# Altium PCB Board_TP3.PcbDoc
Units mm, origin at the board's own origin, x right, y up, seen from the top; angles counter-clockwise.
Board outline 48.4 x 65.3 mm, 2 copper layers (Top Layer, Bottom Layer); 36 components, 22 nets, 140 pads, 0 vias.
Unrouted connection lines stored in the file: 74.
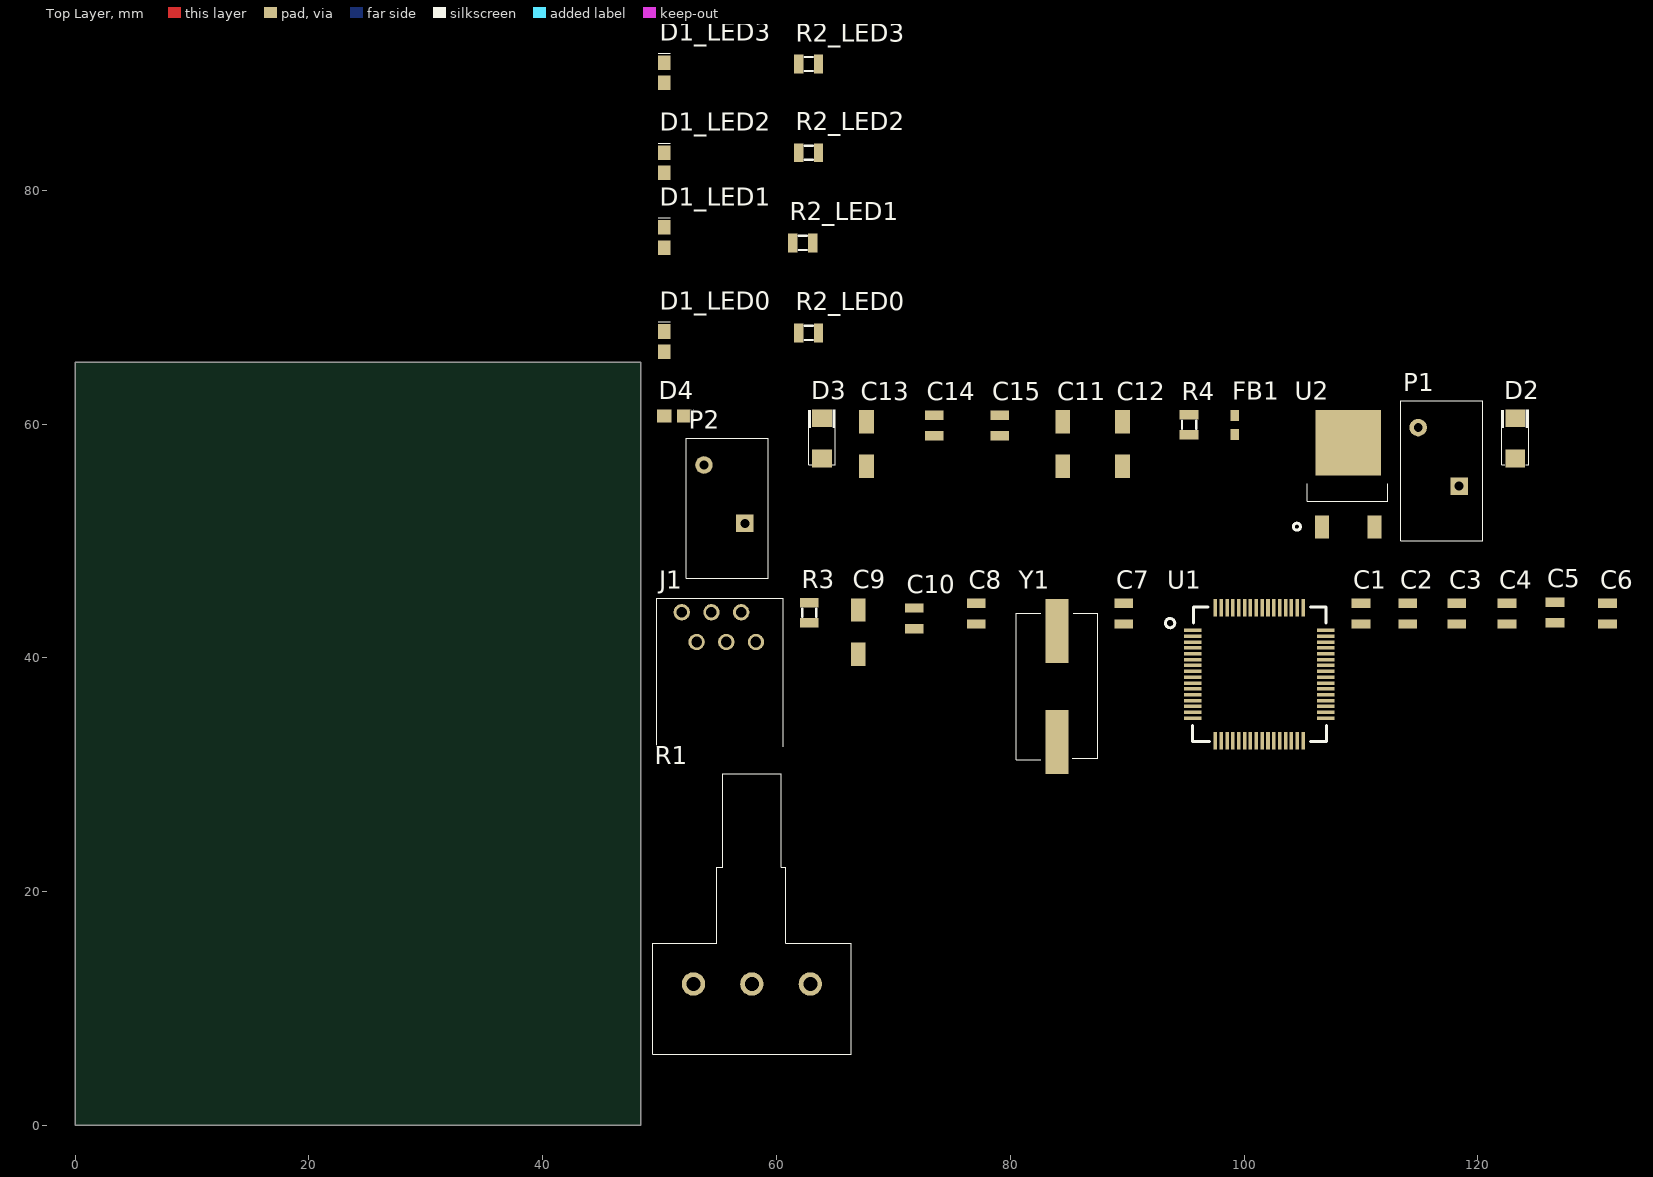
[diagram p0: Top Layer view]
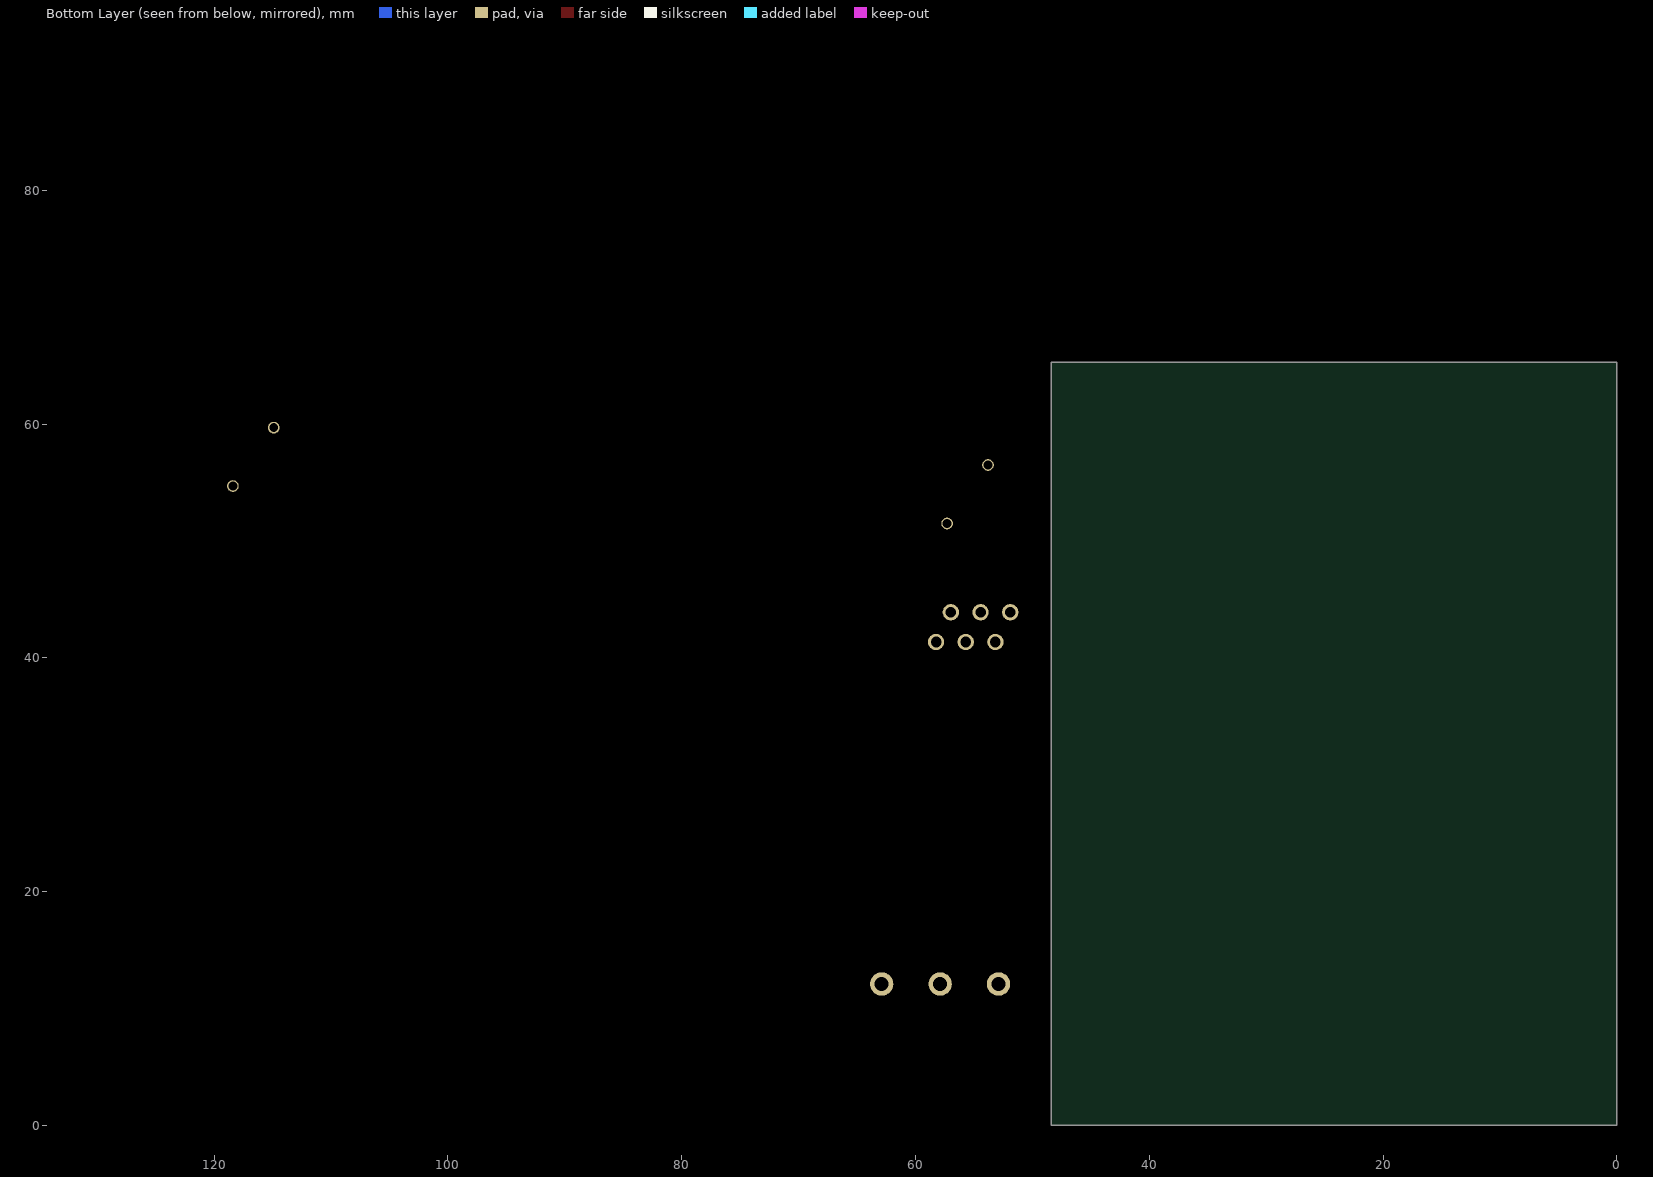
[diagram p1: Bottom Layer view, seen from below]

## Layer stack, top to bottom
Top Solder: solder mask 0.0102, Solder Resist, Dk 3.5
Top Layer: signal copper 0.0356
Dielectric 1: dielectric 0.32, FR-4, Dk 4.8
Bottom Layer: signal copper 0.0356
Bottom Solder: solder mask 0.0102, Solder Resist, Dk 3.5

## Board outline
0,0 48.4,0 48.4,65.3 0,65.3

## Design rules (kind name [scope] priority, off if disabled: settings)
Clearance [All] p1: gap=0.2
HoleSize [All] p1: absolutevalues=TRUE maxlimit=2.54 minlimit=0.3 maxpercent=80.000 minpercent=20.000
PolygonConnect [All] p1: connectstyle=Relief reliefconductorwidth=0.254 reliefentries=4 polygonreliefangle="90 Angle" airgapwidth=0.254
RoutingVias [All] p1: holewidth=0.711 width=1.27 viastyle="Through Hole" minholewidth=0.2 minwidth=0.3 maxholewidth=0.711 maxwidth=1.27
SolderMaskExpansion [All] p1: expansion=0.102
UnpouredPolygon [All] p1: allowunpoured=FALSE
Width [All] p1: maxlimit=0.3 minlimit=0.2 preferedwidth=0.254
28 further rules are at their usual default settings.

## Classes and differential pairs
component class global: R1
component class LED0: D1_LED0 R2_LED0
component class LED1: D1_LED1 R2_LED1
component class LED2: D1_LED2 R2_LED2
component class LED3: D1_LED3 R2_LED3
component class PIC: C1 C2 C3 C4 C5 C6 C7 C8 C9 C10 J1 R3 U1 Y1
component class POWER: C11 C12 C13 C14 C15 D2 D3 D4 FB1 P1 P2 R4 U2
net class LED[0..3]: LED0 LED1 LED2 LED3
channel class led: LED0 LED1 LED2 LED3

## Components (designator, comment, footprint, x,y, rotation, side; value= is the part's Value field where it differs from the comment)
C1 "100nF" CAPC1608N 110,42.9 r0 top
C2 "100nF" CAPC1608N 114,42.9 r0 top
C3 "100nF" CAPC1608N 118.2,42.9 r0 top
C4 "100nF" CAPC1608N 122.5,42.9 r0 top
C5 "100nF" CAPC1608N 126.6,43 r0 top
C6 "100nF" CAPC1608N 131.1,42.9 r0 top
C7 "20pF" CAPC1608N 89.7,42.9 r0 top
C8 "20pF" CAPC1608N 77.1,42.9 r0 top
C9 "10uF" CAPC2012N 67,40.3 r90 top
C10 "1uF" CAPC1608N 71.8,42.5 r0 top
C11 "" CAPC2012N 84.5,56.4 r90 top
C12 "10uF" CAPC2012N 89.6,56.4 r90 top
C13 "Cap" CAPC2012N 67.7,56.4 r90 top
C14 "Cap" CAPC1608N 73.5,59 r0 top
C15 "Cap" CAPC1608N 79.1,59 r0 top
D1_LED0 "Green LED" "LED 0805" 50.4,66.2 r90 top (schematic designator D1)
D1_LED1 "Green LED" "LED 0805" 50.4,75.1 r90 top (schematic designator D1)
D1_LED2 "Green LED" "LED 0805" 50.4,81.5 r90 top (schematic designator D1)
D1_LED3 "Green LED" "LED 0805" 50.4,89.2 r90 top (schematic designator D1)
D2 "Diode" SMA/DO-214AC_21 123.2,60.5 r90 top
D3 "Diode" SMA/DO-214AC_21 63.9,60.5 r90 top
D4 "Green LED" "LED 0805" 50.4,60.7 r0 top
FB1 "Inductor" INDC1608AN 99.2,59.1 r90 top
J1 "Program / Debug" RJ12_90 51.9,43.9 r0 top
P1 "12V" PHOENIX_1985195 113.4,62 r0 top
P2 "12V" PHOENIX_1985195 52.3,58.8 r0 top
R1 "1K" PDB181-K415K-102A2 57.9,12.1 r0 top
R2_LED0 "330r" RESC1608n 63.6,67.8 r90 top (schematic designator R2)
R2_LED1 "330r" RESC1608n 63.1,75.5 r90 top (schematic designator R2)
R2_LED2 "330r" RESC1608n 63.6,83.2 r90 top (schematic designator R2)
R2_LED3 "330r" RESC1608n 63.6,90.8 r90 top (schematic designator R2)
R3 "4.7k" RESC1608N 62.8,43 r0 top
R4 "470r" RESC1608N 95.3,59.1 r0 top
U1 "PIC32MX764F128H-I/PT" PIC 101.3,38.6 r0 top
U2 "AP1117" TD03B_N 108.9,58.4 r0 top
Y1 "8MHz" "HC49/4H SMX CRYSTAL" 84,32.8 r90 top

## Footprints (in the part's own frame and the unit in brackets; to place one, negate y for a bottom-side part, rotate by r counter-clockwise, add the part's x,y. Pads: shape width x height; smd on the part's side, far side on the other; paste and mask are expansions set on the pad)
CAPC1608N [mm] "100nF"
  rect 1.6x0.8 smd: 1(0,0) 2(0,1.77)
CAPC2012N [mm]
  rect 2x1.25 smd: 1(0,0) 2(3.8,0)
"HC49/4H SMX CRYSTAL" [mm]
  rect 5.5x2 smd: 1(0,0) 2(9.5,0)
  silkscreen extent -1.5,-3.5 11,3.5
INDC1608AN [mm]
  rect 0.95x0.7 smd: 1(0,0) 2(1.65,0)
"LED 0805" [mm]
  rect 1.25x1.1 smd: 1(0,0) 2(1.725,0)
  silkscreen extent 2.54,-0.51 2.54,0.51
PDB181-K415K-102A2 [mm]
  round 2 hole 1.2: 1(5,0) 2(0,0) 3(-5,0)
  silkscreen extent -8.5,-6 8.5,18
PHOENIX_1985195 [mm]
  round 1.5 / inner round 1.5 / far side round 1 hole 0.762: 1(1.5,-2.3)
  rect 1.5x1.5 / inner round 1.524 / far side round 1 hole 0.762: 2(5,-7.3)
  silkscreen extent 0,-12 7,0
PIC [mm]
  rect 1.5x0.3 smd: 1(-5.7,3.75) 2(-5.7,3.25) 3(-5.7,2.75) 4(-5.7,2.25) 5(-5.7,1.75) 6(-5.7,1.25) 7(-5.7,0.75) 8(-5.7,0.25) 9(-5.7,-0.25) 10(-5.7,-0.75) 11(-5.7,-1.25) 12(-5.7,-1.75) 13(-5.7,-2.25) 14(-5.7,-2.75) 15(-5.7,-3.25) 16(-5.7,-3.75) 33(5.7,-3.75) 34(5.7,-3.25) 35(5.7,-2.75) 36(5.7,-2.25) 37(5.7,-1.75) 38(5.7,-1.25) 39(5.7,-0.75) 40(5.7,-0.25) 41(5.7,0.25) 42(5.7,0.75) 43(5.7,1.25) 44(5.7,1.75) 45(5.7,2.25) 46(5.7,2.75) 47(5.7,3.25) 48(5.7,3.75)
  rect 0.3x1.5 smd: 17(-3.75,-5.7) 18(-3.25,-5.7) 19(-2.75,-5.7) 20(-2.25,-5.7) 21(-1.75,-5.7) 22(-1.25,-5.7) 23(-0.75,-5.7) 24(-0.25,-5.7) 25(0.25,-5.7) 26(0.75,-5.7) 27(1.25,-5.7) 28(1.75,-5.7) 29(2.25,-5.7) 30(2.75,-5.7) 31(3.25,-5.7) 32(3.75,-5.7) 49(3.75,5.7) 50(3.25,5.7) 51(2.75,5.7) 52(2.25,5.7) 53(1.75,5.7) 54(1.25,5.7) 55(0.75,5.7) 56(0.25,5.7) 57(-0.25,5.7) 58(-0.75,5.7) 59(-1.25,5.7) 60(-1.75,5.7) 61(-2.25,5.7) 62(-2.75,5.7) 63(-3.25,5.7) 64(-3.75,5.7)
  silkscreen extent -8.02,-5.75 5.75,5.75
RESC1608n [mm]
  rect 1.6x0.8 smd: 1(0,1.705) 2(0,0)
  silkscreen extent -0.6,0.5 0.6,1.2
RESC1608N [mm]
  rect 1.6x0.8 smd: 1(0,1.705) 2(0,0)
  silkscreen extent -0.6,0.5 0.6,1.2
RJ12_90 [mm]
  round 1.4 hole 0.9: 1(0,0) 2(1.27,-2.54) 3(2.54,0) 4(3.81,-2.54) 5(5.08,0) 6(6.35,-2.54)
  silkscreen extent -2.16,-11.5 8.69,1.19
SMA/DO-214AC_21 [mm]
  rect 1.52x1.68 smd: 1(-3.454,0) 2(-0.004,0)
  silkscreen extent -3.96,-1.14 0.71,1.14
TD03B_N [mm]
  rect 1.2x2 smd: 1(2.25,-7.2) 3(-2.25,-7.2)
  rect 5.6x5.6 smd: 4(0,0)
  silkscreen extent -4.67,-7.47 3.4,-3.5

## Part data
C1 C2 C3 C4 C5 C6 C7 C8 C9 C10 C11 C12: library part Cap, "Capacitor"
C13 C14 C15: "Capacitor"
D1_LED0 D1_LED1 D1_LED2 D1_LED3 D4: library part LED0, "Typical INFRARED GaAs LED"
D2 D3: "Default Diode"
R1: library part RPot, "Potentiometer"
R2_LED0 R2_LED1 R2_LED2 R2_LED3 R3 R4: library part Res1, "Resistor"
U1: library part "Pic - 32MX"
Y1: library part XTAL, "Crystal Oscillator"

## Nets (pads, with @x,y where several pads share a name; then routed paths per layer and width w, separated by ;. In a path a pad name is that pad's centre, name@x,y a point inside that pad or via, vN(x,y) a via of type N, cw(c..) or ccw(c..) an arc to the next point about the centre after c; other vN are vias at no path point)
ALIM: D2.1 P1.1
BATTERY: D3.1 P2.1
GND: C1.1 C2.1 C3.1 C4.1 C5.1 C6.1 C7.2 C8.2 C9.1 C10.1 C11.1 C12.1 C13.1 C14.1 C15.1 D1_LED0.2 D1_LED1.2 D1_LED2.2 D1_LED3.2 D4.2 J1.3 P1.2 P2.2 R1.1 U1.9 U1.20 U1.25 U1.41 U2.1
LED0: R2_LED0.2 U1.46
LED1: R2_LED1.2 U1.49
LED2: R2_LED2.2 U1.50
LED3: R2_LED3.2 U1.51
MCLR: J1.1 R3.1 U1.7
NetC9_2: C9.2 C10.2 U1.56
NetD1_LED0_1: D1_LED0.1 R2_LED0.1
NetD1_LED1_1: D1_LED1.1 R2_LED1.1
NetD1_LED2_1: D1_LED2.1 R2_LED2.1
NetD1_LED3_1: D1_LED3.1 R2_LED3.1
NetD4_1: D4.1 R4.1
NetR1_3: R1.3 U1.14
PGC: J1.5 U1.15
PGD: J1.4 U1.16
V3P3: C1.2 C2.2 C3.2 C4.2 C5.2 C13.2 C14.2 FB1.1 J1.2 R3.2 U1.10 U1.26 U1.35 U1.38 U1.57 U2.4
V3P3A: C6.2 C15.2 FB1.2 R1.2 U1.19
V5: C11.2 C12.2 D2.2 D3.2 R4.2 U2.3
X1: C7.1 U1.39 Y1.2
X2: C8.1 U1.40 Y1.1
pads on no net: J1.6 U1.1 U1.2 U1.3 U1.4 U1.5 U1.6 U1.8 U1.11 U1.12 U1.13 U1.17 U1.18 U1.21 U1.22 U1.23 U1.24 U1.27 U1.28 U1.29 U1.30 U1.31 U1.32 U1.33 U1.34 U1.36 U1.37 U1.42 U1.43 U1.44 U1.45 U1.47 U1.48 U1.52 U1.53 U1.54 U1.55 U1.58 U1.59 U1.60 U1.61 U1.62 U1.63 U1.64